# EAGLE board Mentor-FEL (EAGLE 3.55)

No outline drawn. Coordinates in mm, seen from the top.
Copper layers used: 

## Footprints (pad centres in the part's own frame; a part is rotated, then mirrored left to right if it is on the bottom)
00 = drill 0.61 pad 1.27 octagon:  10.16,1.27 | drill 0.61 pad 1.27 round:  10.16,-1.27 | hole 1.016: 0,0
01 = drill 0.61 pad 1.27 round:  2.54,-1.27;  0,-1.27 | drill 0.61 pad 1.27 octagon:  2.54,1.27;  0,1.27
07 = drill 0.61 pad 1.27 octagon:  7.62,1.27 | drill 0.61 pad 1.27 round:  7.62,-1.27 | hole 1.016: 0,0
08 = drill 0.61 pad 1.27 round:  2.54,-1.27 | drill 0.61 pad 1.27 octagon:  2.54,1.27 | hole 1.016: 0,0
10 = drill 0.61 pad 1.27 round:  12.7,0 | hole 1.016: 0,0
11 = drill 0.61 pad 1.27 round:  17.78,1.27;  15.24,1.27;  2.54,1.27 | hole 1.016: 0,0
12 = drill 0.61 pad 1.27 round:  5.08,-1.27;  0,1.27 | hole 1.016: 0,-1.27
17 = drill 0.61 pad 1.27 round:  2.54,0;  -2.54,0 | hole 1.016: 0,0
21 = drill 1.27 pad 1.93 round:  5.08,0;  15.24,0 | hole 1.016: 0,0
24 = drill 0.61 pad 1.27 round:  2.54,0;  -2.54,0 | hole 1.016: 0,0
31 = drill 0.61 pad 1.27 octagon:  2.54,0 | drill 0.61 pad 1.27 round:  2.54,2.54;  2.54,-2.54 | hole 1.016: 0,0
40 = drill 0.61 pad 1.27 round:  1.27,-1.27;  6.35,-1.27 | drill 0.61 pad 1.27 octagon:  3.81,-1.27 | hole 1.016: 0,0
40/1 = drill 0.61 pad 1.27 round:  1.27,-1.27;  6.35,-1.27;  1.27,1.27;  6.35,1.27 | drill 0.61 pad 1.27 octagon:  3.81,-1.27;  3.81,1.27 | hole 1.016: 0,0
44 = drill 0.61 pad 1.27 round:  0,-2.54;  10.16,-2.54;  10.16,2.54;  2.54,2.54;  12.7,0 | drill 0.61 pad 1.27 octagon:  5.08,-2.54;  5.08,2.54;  10.16,0
45 = drill 0.61 pad 1.27 round:  0,-1.27;  0,1.27;  2.54,-1.27 | drill 0.61 pad 1.27 octagon:  2.54,1.27
46 = drill 0.61 pad 1.27 round:  0,-1.27;  0,1.27
47 = drill 0.61 pad 1.27 octagon:  5.08,0 | drill 0.61 pad 1.27 round:  5.08,2.54;  5.08,-2.54 | hole 1.016: 0,0
48 = drill 0.61 pad 1.27 round:  0,3.81;  2.54,3.81;  5.08,3.81;  7.62,3.81 | drill 0.61 pad 1.27 octagon:  5.08,-3.81 | hole 1.016: 0,0
49 = drill 1.27 pad 1.93 round:  15.24,0;  0,-2.54;  7.62,2.54
52 = drill 0.61 pad 1.27 round:  2.54,2.54;  2.54,-2.54 | hole 1.016: 0,0
52/1 = drill 0.61 pad 1.27 round:  -2.54,0;  2.54,0
57 = drill 0.813 pad 1.422 round:  0,-0.77;  5.08,-0.77 | drill 0.813 pad 1.422 octagon:  2.54,-0.77
05 = drill 0.61 pad 1.27 round:  5.08,-1.27;  2.54,-1.27;  0,-1.27 | drill 0.61 pad 1.27 octagon:  5.08,1.27;  2.54,1.27;  0,1.27

## Placement (x,y rotation side)
1800  [00]  17.78,215.9 90 top
1801  [01]  25.4,215.9 90 top
1807  [07]  33.02,215.9 90 top
1808  [08]  40.64,215.9 90 top
1810  [10]  48.26,215.9 90 top
1811  [11]  55.88,215.9 90 top
1812  [12]  60.96,215.9 90 top
1817  [17]  162.56,215.9 90 top
1821  [21]  88.9,215.9 90 top
1824  [24]  66.04,215.9 90 top
1831  [31]  78.74,215.9 90 top
1840  [40]  116.84,215.9 90 top
1840/1  [40/1]  121.92,215.9 90 top
1844  [44]  109.22,215.9 90 top
1845  [45]  152.4,215.9 90 top
1846  [46]  157.48,215.9 90 top
1847  [47]  99.06,215.9 90 top
1848  [48]  134.62,215.9 90 top
1849  [49]  170.18,215.9 90 top
1852  [52]  144.78,215.9 90 top
1852/1  [52/1]  144.78,180.34 270 top
1857  [57]  127,215.9 90 top
1905  [05]  71.12,215.9 90 top
T808-1  [-35SC]  0,0 0 top

## Library data of the parts
1800 1801 1807 1808 1810-1812 1817 1821 1824 1831 1840 1840/1 1844-1849 1852 1852/1 1857 1905 = mentor-f
T808-1 = BLATT